# Altium PCB Oscillator.PcbDoc
Units mm, origin at the board's own origin, x right, y up, seen from the top; angles counter-clockwise.
Board outline 33.8 x 23.8 mm, 2 copper layers (Top Layer, Bottom Layer); 11 components, 9 nets, 37 pads, 0 vias.
Unrouted connection lines stored in the file: 20.
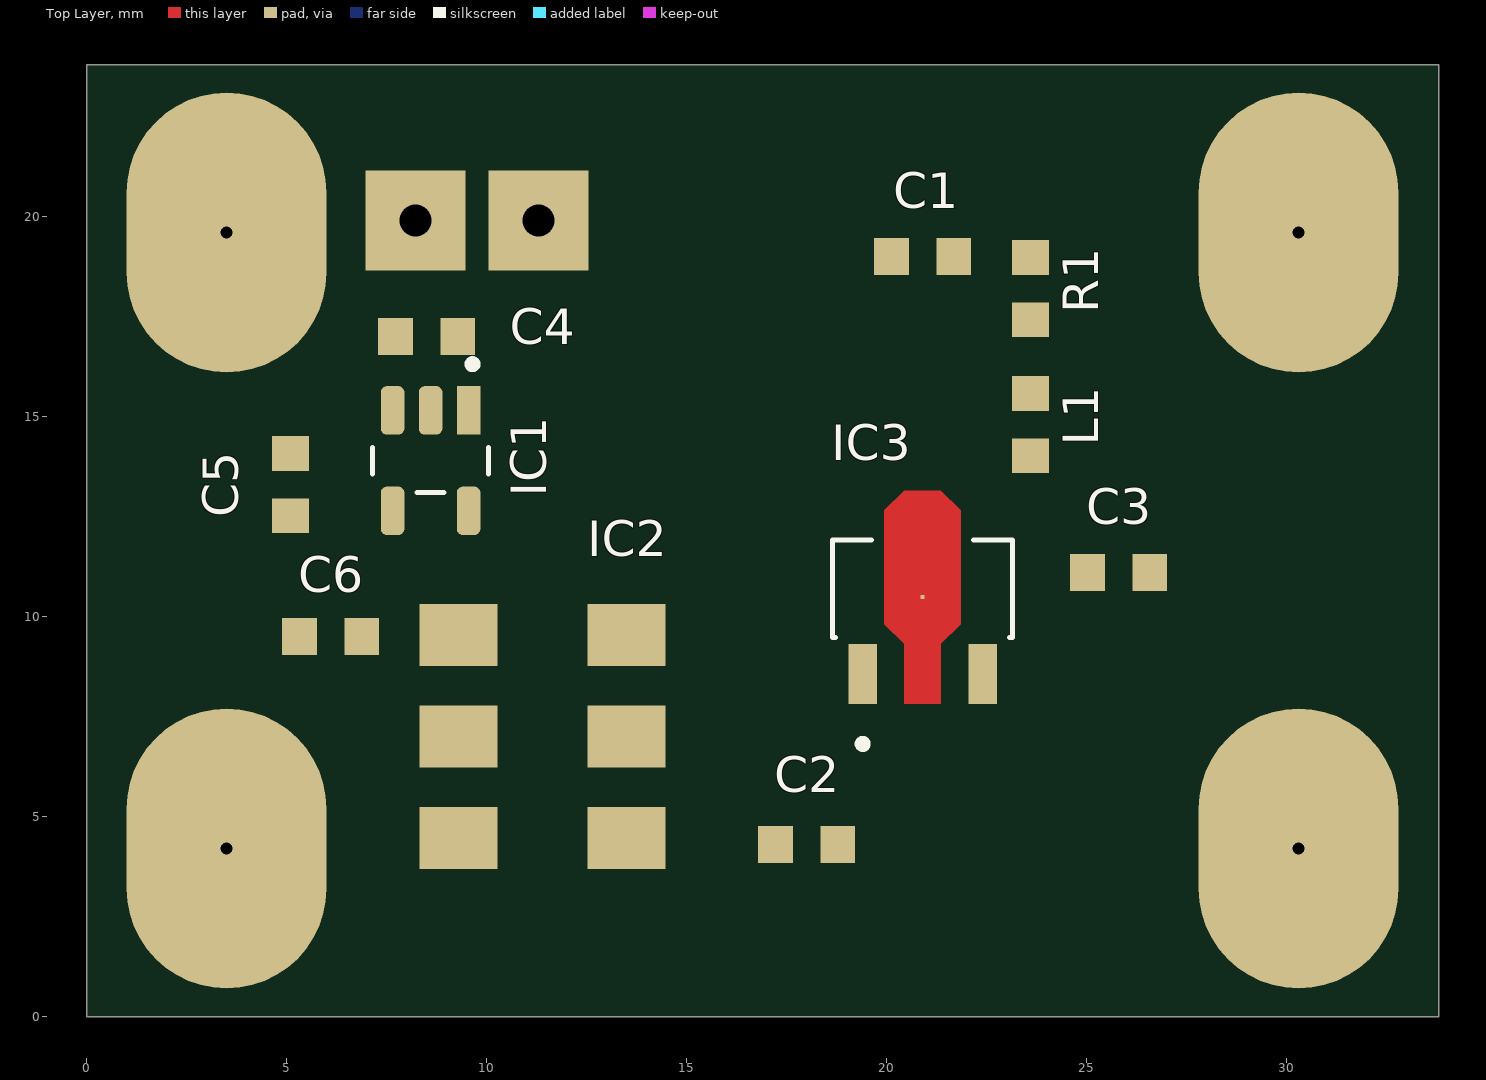
[diagram p0: Top Layer view]
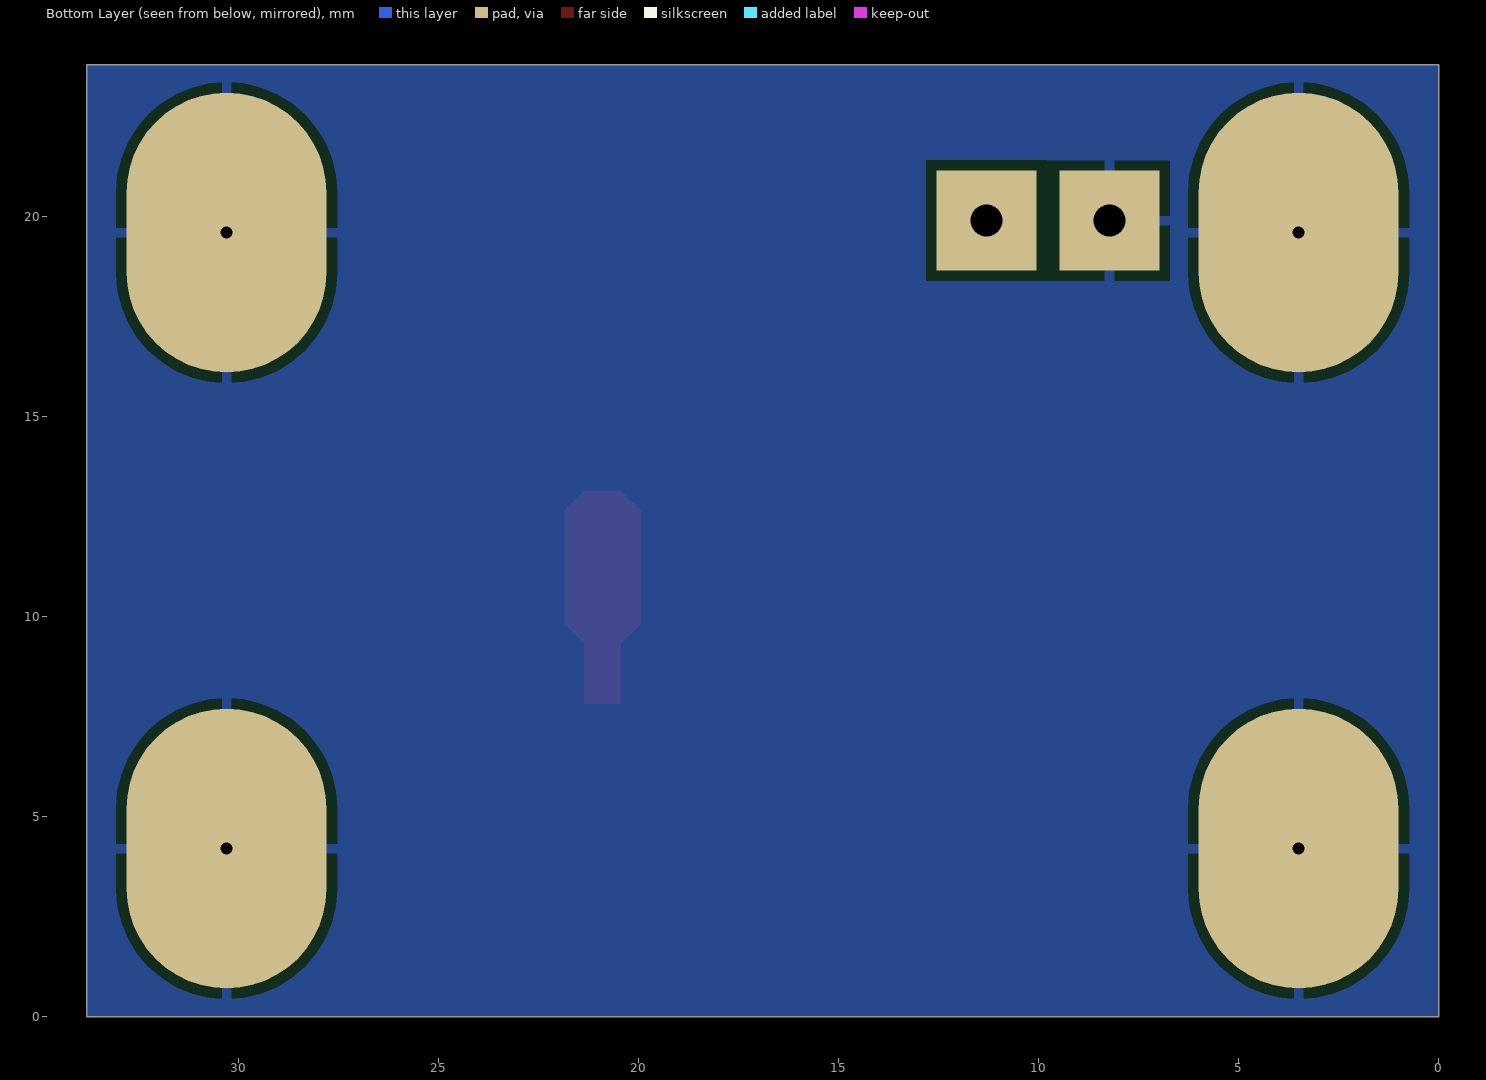
[diagram p1: Bottom Layer view, seen from below]

## Layer stack, top to bottom
Top Solder: solder mask 0.0102, Solder Resist, Dk 3.5
Top Layer: signal copper 0.0356
Dielectric 1: dielectric 0.32, FR-4, Dk 4.8
Bottom Layer: signal copper 0.0356
Bottom Solder: solder mask 0.0102, Solder Resist, Dk 3.5

## Board outline
0,0 33.8,0 33.8,23.8 0,23.8

## Design rules (kind name [scope] priority, off if disabled: settings)
Clearance [All] p1: gap=0.254 ignorepadtopadclearanceinfootprint=FALSE except(0: Arc-Hole Track-Hole SMDPad-Hole THPad-Hole Via-Hole Fill-Hole Poly-Hole Region-Hole Text-Hole)
PlaneConnect [All] p1: planeconnectstyle=Direct reliefexpansion=0.508 reliefentries=4 reliefconductorwidth=0.254 reliefairgap=0.254
PolygonConnect [All] p1: connectstyle=Relief reliefconductorwidth=0.254 reliefentries=4 polygonreliefangle="90 Angle" airgapwidth=0.254
RoutingVias [All] p1: holewidth=0.711 width=1.27 viastyle="Through Hole" minholewidth=0.711 minwidth=1.27 maxholewidth=0.711 maxwidth=1.27
SolderMaskExpansion [All] p1: expansion=0.102 istentingtop=FALSE
Width [All] p1: maxlimit=0.254 minlimit=0.254 preferedwidth=0.254
29 further rules are at their usual default settings.

## Components (designator, comment, footprint, x,y, rotation, side; value= is the part's Value field where it differs from the comment)
C1 "100n" 0603_CAP 20.9,19 r0 top
C2 "2400p" 0603_CAP 18,4.3 r0 top
C3 "2400p" 0603_CAP 25.8,11.1 r0 top
C4 "1u" 0603_CAP 8.5,17 r0 top
C5 "1u" 0603_CAP 5.1,13.3 r270 top
C6 "1u" 0603_CAP 6.1,9.5 r0 top
IC1 "TLV77325" IC_TLV77325PDBVR_TEXAS_INSTRUMENTS 8.6,13.9 r270 top
IC2 "Si530" IC_530FC200M000DG 11.4,7 r0 top
IC3 "GALI-74+" IC_GALI74+_MINI_CIRCUITS 20.9,10.7 r0 top
L1 "100n" 0603_CAP 23.6,14.8 r90 top
R1 "25R" 0603_RESISTOR 23.6,18.2 r270 top

## Footprints (in the part's own frame and the unit in brackets; to place one, negate y for a bottom-side part, rotate by r counter-clockwise, add the part's x,y. Pads: shape width x height; smd on the part's side, far side on the other; paste and mask are expansions set on the pad)
0603_CAP [mm]
  rect 0.87x0.93 smd: 1(-0.78,0) 2(0.78,0)
  body extent -0.8,-0.4 0.8,0.4, height 0.9
0603_RESISTOR [mm]
  rect 0.87x0.93 smd: 1(-0.78,0) 2(0.78,0)
  body extent -0.77,-0.4 0.77,0.4, height 0.55
IC_530FC200M000DG [mm] "Standard Clock Oscillators Differential/single-ended; single frequency XO; OE pin 2 (pin 1 for CMOS); 10-1417 MHz"
  rect 1.95x1.55 smd: 1(-2.1,2.54) 2(-2.1,0) 3(-2.1,-2.54) 4(2.1,-2.54) 5(2.1,0) 6(2.1,2.54)
IC_GALI74+_MINI_CIRCUITS [mil] "RF Amplifier ML AMPL / SURF MT / RoHS"
  rect 28x59 smd: 1(-59,-84) 3(59,-84)
  round 1 smd: 2(0,-8.5)
  rect 3.94x3.94 smd paste-39.37 mask+0: 2_4(0,-8.5)
  Top Layer region: 37.5,77 37.5,-35 18,-54.5 18,-113.5 -18,-113.5 -18,-54.5 -37.5,-35 -37.5,77 -18,96.5 18,96.5
  silkscreen extent -88,-157 88,48, body extent -89,-100 89,61, height 63
IC_TLV77325PDBVR_TEXAS_INSTRUMENTS [mm] "LDO Voltage Regulators 300-mA high-PSRR low -IQ low-dropout regulator"
  rect 1.21x0.59 smd: 1(-1.255,0.95)
  rrect50% 1.21x0.59 smd: 2(-1.255,0) 3(-1.255,-0.95) 4(1.255,-0.95) 5(1.255,0.95)
  silkscreen extent -2.51,-1.45 0.8,1.45, body extent -1.43,-1.45 1.37,1.45, height 1.46

## Part data
C1 C2 C3 C4 C5 C6: library part CAP_0603_generic
IC1: library part IC_TLV77325_TEXAS_INSTRUMENTS, "LDO Voltage Regulators 300-mA high-PSRR low -IQ low-dropout regulator"
IC2: library part IC_SI530_SILICON_LABS
IC3: library part IC_GALI74+_MINI_CIRCUITS, "RF Amplifier ML AMPL / SURF MT / RoHS"
L1: library part IND_air_0603_generic
R1: library part RES_0603_generic, "3/4W"

## Free pads (board coordinates)
  oval 5x7 hole 0.3: 62(3.5,4.2) 63(3.5,19.6) 64(30.3,19.6) 66(30.3,4.2)
  rect 2.5x2.5 hole 0.8: 67(8.228,19.897) 67(11.3,19.9)

## Nets (pads, with @x,y where several pads share a name; then routed paths per layer and width w, separated by ;. In a path a pad name is that pad's centre, name@x,y a point inside that pad or via, vN(x,y) a via of type N, cw(c..) or ccw(c..) an arc to the next point about the centre after c; other vN are vias at no path point)
+2V5: C5.2 C6.2 IC1.4 IC2.1 IC2.6
+5V: C1.2 C4.2 IC1.1 IC1.3 pad.67@11.3,19.9 R1.1
GND: C1.1 C4.1 C5.1 C6.1 IC1.2 IC2.3 IC3.2 pad.62 pad.63 pad.64 pad.66 pad.67@8.228,19.897
NetC2_1: C2.1 IC3.1
NetC2_2: C2.2
NetC3_2: C3.2 IC3.3 L1.1
NetFL1_1: IC2.4
NetL1_2: L1.2 R1.2
OSC_OUT: C3.1
pads on no net: IC1.5 IC2.2 IC2.5 IC3.2_4

## Polygon pours and split planes (outlines as drawn)
GND on Bottom Layer "GND_L02_P000" (solid, pour order 0): 0,23.8 33.8,23.8 33.8,0 0,0